# Altium PCB PowerBoard.PcbDoc
Units mm, origin at the board's own origin, x right, y up, seen from the top; angles counter-clockwise.
Board outline 59 x 39 mm, 2 copper layers (Top Layer, Bottom Layer), stack 1.571 mm thick; 18 components, 9 nets, 65 pads, 48 vias.
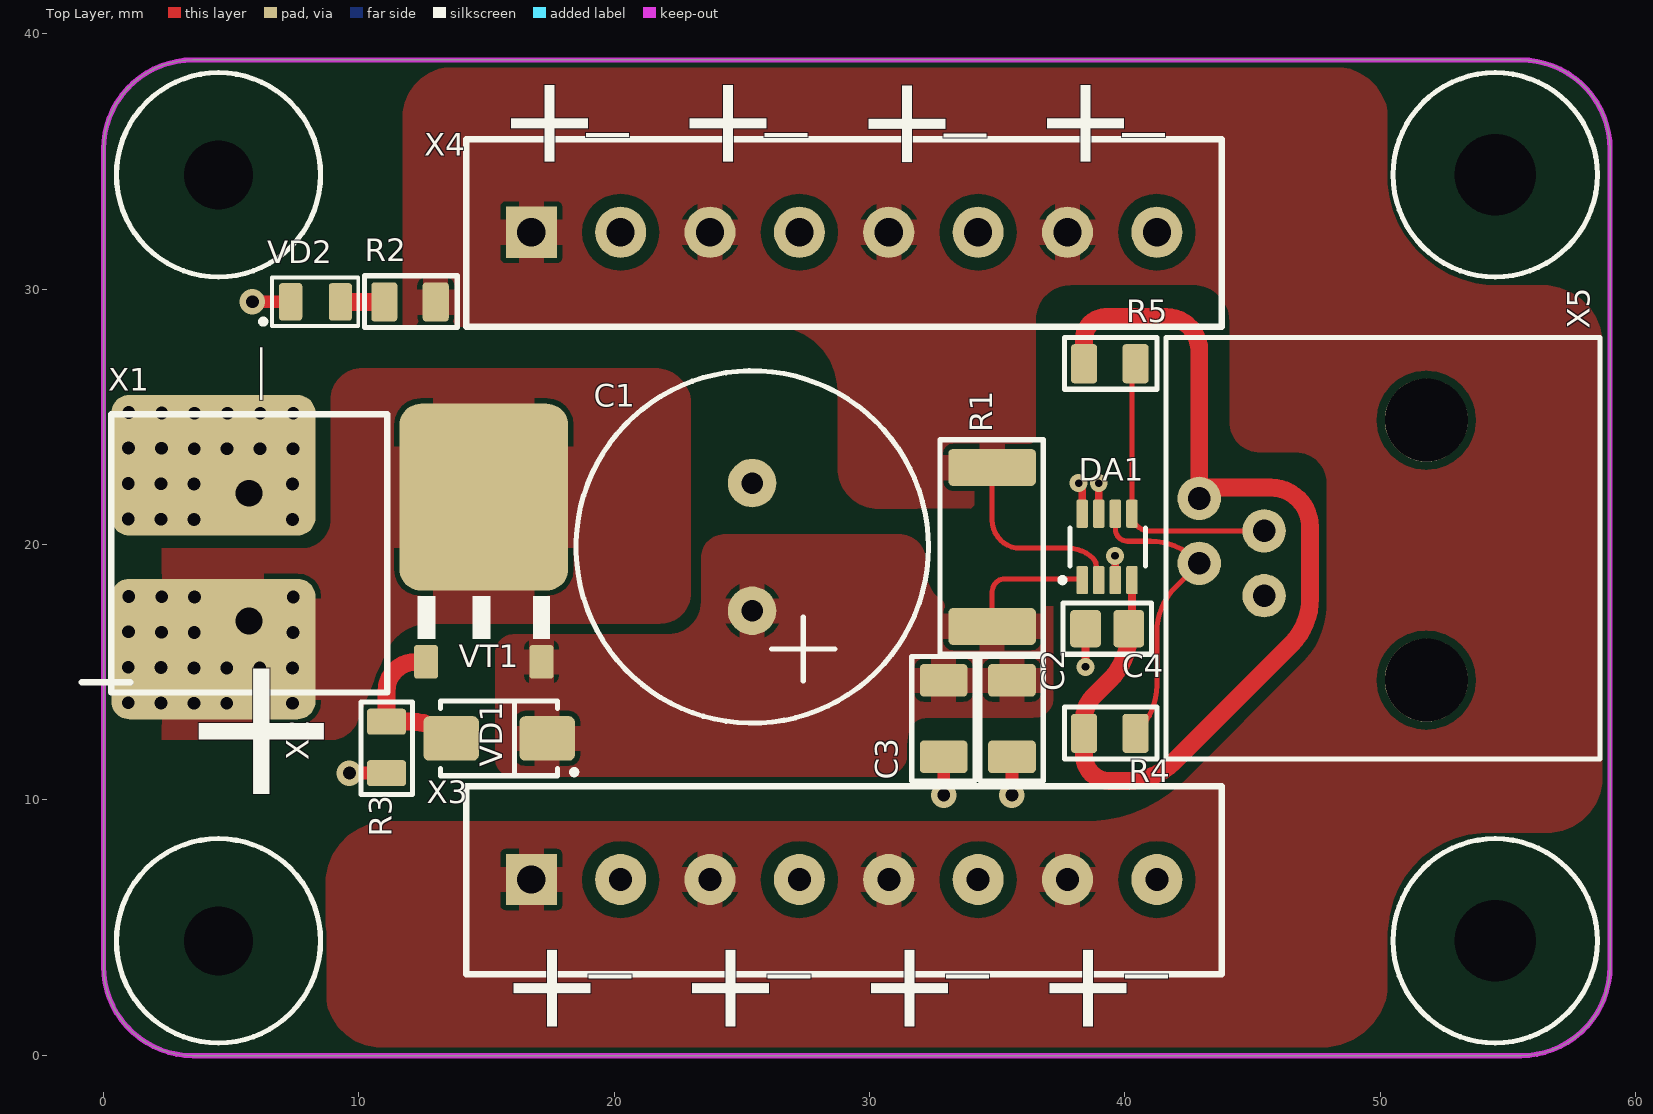
[diagram p0: Top Layer view]
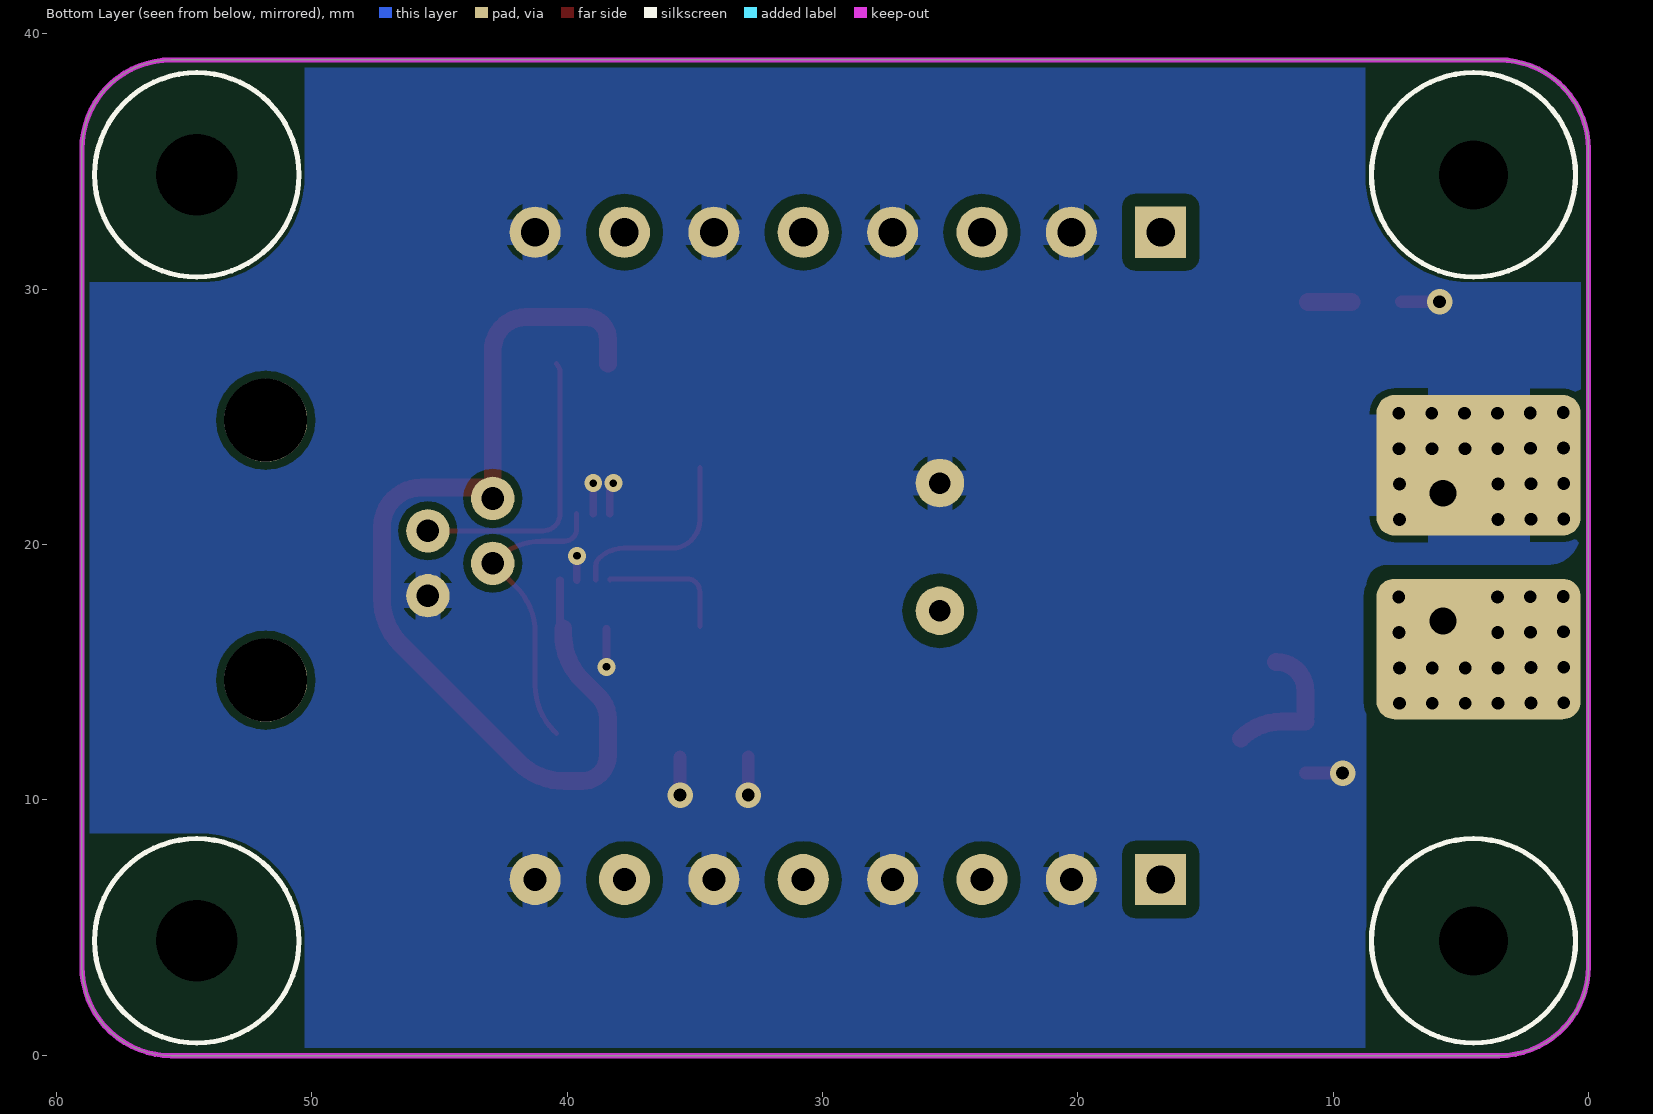
[diagram p1: Bottom Layer view, seen from below]

## Layer stack, top to bottom
Top Solder: solder mask 0.0102, Solder Resist, Dk 3.5
Top Layer: signal copper 0.0356
Dielectric 1: dielectric 1.5, FR-4, Dk 4.8
Bottom Layer: signal copper 0.0356
Bottom Solder: solder mask 0.0102, Solder Resist, Dk 3.5

## Board outline
3.5,-0.025 cw(c3.5,3.475) 0,3.475 0,35.475 cw(c3.5,35.475) 3.5,38.975 55.5,38.975 cw(c55.5,35.475) 59,35.475 59,3.475 cw(c55.5,3.475) 55.5,-0.025

## Design rules (kind name [scope] priority, off if disabled: settings)
Clearance Clearance_POWER_12B [InNet('12B') vs InNet('GND')] p1: gap=0.5 ignorepadtopadclearanceinfootprint=FALSE except(0: Arc-Hole Track-Hole SMDPad-Hole THPad-Hole Via-Hole Fill-Hole Poly-Hole Region-Hole Text-Hole; 0.2: Arc-SMDPad Arc-Via Track-SMDPad Track-Via SMDPad-SMDPad SMDPad-Via)
Clearance Clearance_POWER_12B_1 [InNet('NetVT1_2') vs InNet('GND')] p2: gap=0.5 ignorepadtopadclearanceinfootprint=FALSE except(0: Arc-Hole Track-Hole SMDPad-Hole THPad-Hole Via-Hole Fill-Hole Poly-Hole Region-Hole Text-Hole)
Clearance Clearance_POWER_12B_2 [InNet('NetC1_1') vs InNet('GND')] p3: gap=0.5 ignorepadtopadclearanceinfootprint=FALSE except(0: Arc-Hole Track-Hole SMDPad-Hole THPad-Hole Via-Hole Fill-Hole Poly-Hole Region-Hole Text-Hole)
Clearance Clearance_POWER_5B [InNet('5B') vs InNet('DGND')] p4: gap=0.3 ignorepadtopadclearanceinfootprint=FALSE except(0: Arc-Hole Track-Hole SMDPad-Hole THPad-Hole Via-Hole Fill-Hole Poly-Hole Region-Hole Text-Hole; 0.2: SMDPad-SMDPad; 0.4: Arc-THPad Track-THPad THPad-THPad THPad-Fill THPad-Poly THPad-Region)
Clearance [All] p5: gap=0.2 ignorepadtopadclearanceinfootprint=FALSE except(0: Arc-Hole Track-Hole SMDPad-Hole THPad-Hole Via-Hole Fill-Hole Poly-Hole Region-Hole Text-Hole; 0.3: Arc-THPad Track-THPad THPad-THPad THPad-Via THPad-Fill THPad-Poly THPad-Region THPad-Text)
HoleSize [All] p1: absolutevalues=TRUE maxlimit=5 minlimit=0.2 maxpercent=80.000 minpercent=20.000
HoleToHoleClearance [All] p1: gap=0 allowstackedmicrovias=TRUE
MinimumSolderMaskSliver [All] p1: minsoldermaskwidth=0.05
PolygonConnect NetTieDirect [InComponentClass('NetTieDirect')] p1: connectstyle=Direct reliefconductorwidth=0.254 reliefentries=4 polygonreliefangle="90 Angle" airgapwidth=0.254
PolygonConnect NetTieRelief [InComponentClass('NetTieRelief')] p2: connectstyle=Direct reliefconductorwidth=0.6 reliefentries=4 polygonreliefangle="90 Angle" airgapwidth=0.2
PolygonConnect PolygonConnect_GND_2 [HasFootprint('XT60-M') And OnLayer('Bottom Layer') vs InNet('GND')] p3: connectstyle=Relief reliefconductorwidth=4 reliefentries=4 polygonreliefangle="90 Angle" airgapwidth=0.254
PolygonConnect PolygonConnect_GND [InNet('GND')] p4: connectstyle=Relief reliefconductorwidth=1 reliefentries=4 polygonreliefangle="90 Angle" airgapwidth=0.2
PolygonConnect PolygonConnect_GND_12B [InNet('NetVT1_2')] p5: connectstyle=Relief reliefconductorwidth=4 reliefentries=4 polygonreliefangle="90 Angle" airgapwidth=0.2
PolygonConnect PolygonConnect_GND_12B_2 [InNet('NetC1_1')] p6: connectstyle=Relief reliefconductorwidth=1 reliefentries=4 polygonreliefangle="90 Angle" airgapwidth=0.2
PolygonConnect PolygonConnect_GND_12B_1 [InNet('12B')] p7: connectstyle=Relief reliefconductorwidth=1 reliefentries=4 polygonreliefangle="90 Angle" airgapwidth=0.2
PolygonConnect PolygonConnect_GND_1 [HasFootprint('TERMINAL 3 way-3.5mm') vs InNet('GND')] p8: connectstyle=Direct reliefconductorwidth=0.6 reliefentries=4 polygonreliefangle="90 Angle" airgapwidth=0.2
PolygonConnect PolygonConnect_via [IsVia] p9: connectstyle=Direct reliefconductorwidth=0.6 reliefentries=4 polygonreliefangle="90 Angle" airgapwidth=0.2
PolygonConnect [All] p10: connectstyle=Relief reliefconductorwidth=0.6 reliefentries=4 polygonreliefangle="90 Angle" airgapwidth=0.2
RoutingVias [All] p1: holewidth=0.711 width=1.27 viastyle="Through Hole" minholewidth=0.711 minwidth=1.27 maxholewidth=0.711 maxwidth=1.27
SilkToSilkClearance [All] p1: silktosilkclearance=0
SilkToSolderMaskClearance [IsPad] p1: minsilkscreentomaskgap=0 clearancetoexposedcopper=TRUE
SolderMaskExpansion [All] p1: expansion=0.05
Width [All] p1: maxlimit=3 minlimit=0.2 preferedwidth=0.3
25 further rules are at their usual default settings.

## Components (designator, comment, footprint, x,y, rotation, side; value= is the part's Value field where it differs from the comment)
C1 "Capacitor_pol" K50-35(10X20)_V 25.4,19.9 r180 top value=470мк
C2 "Capacitor" C1206 35.55,13.206 r90 top value=2,2мк
C3 "Capacitor" C1206 32.875,13.206 r90 top value=2,2мк
C4 "Capacitor" C0805 39.303,16.7 r0 top value=0,1мк
DA1 "INA219BIDCNT" SOT23-8 39.3,19.9 r90 top
R1 "Resistor_1Вт" R2512 34.8,19.9 r90 top value=0,01
R2 "Resistor_0,125Вт" R0805 12,29.498 r0 top value=1к
R3 "Resistor_0,125Вт" R0805 11.079,12.05 r270 top value=10к
R4 "Resistor_0,125Вт" R0805 39.407,12.6 r0 top value=10к
R5 "Resistor_0,125Вт" R0805 39.407,27.075 r0 top value=10к
VD1 "DiodeZener" SMA 15.489,12.4 r180 top
VD2 "LED" L_0805 8.3,29.5 r0 top
VT1 "P-MOSFET" DPAK 14.889,21.699 r0 top
X1 "Header_2_trm" TERMINAL-2WAY-5MM 5.7,19.5 r90 top
X2 "Header_2_sct" XT60-M 0.3,19.5 r90 top
X3 "Header_8_trm" TERMINAL-8WAY-3.5MM 29,6.875 r0 top
X4 "Header_8_trm" TERMINAL-8WAY-3.5MM_ 29,32.225 r0 top
X5 "Header_4_sct" 69254-002LF 50.1,19.9 r270 top

## Footprints (in the part's own frame and the unit in brackets; to place one, negate y for a bottom-side part, rotate by r counter-clockwise, add the part's x,y. Pads: shape width x height; smd on the part's side, far side on the other; paste and mask are expansions set on the pad)
69254-002LF [mm]
  round 1.7 hole 0.89: 1(-0.63,-4.65) 2(-1.9,-7.19) 3(1.91,-4.65) 4(0.64,-7.19)
  round 3.25 hole 3.25 unplated: ""(-4.965,1.7) ""(5.215,1.7)
  silkscreen extent -8.2,-8.5 8.3,8.5, body extent -7.85,-8.19 7.9,8.19, height 15.05
C0805 [mm]
  rrect25% 1.21x1.46 smd paste-5: 1(-0.845,0) 2(0.845,0)
  silkscreen extent -1.73,-1 1.73,1, body extent -1,-0.62 1,0.63, height 0.78
C1206 [mm]
  rrect25% 1.28x1.87 smd: 1(-1.528,-0.024) 2(1.472,-0.024)
  silkscreen extent -2.47,-1.25 2.4,1.23, body extent -1.6,-0.85 1.6,0.85, height 1.75
DPAK [mil]
  rrect25% 37x52 smd: 1(-89,-248) 3(89,-248)
  rrect25% 260x288 smd: 2(0,6)
  silkscreen extent -102,-213 102,-146, body extent -193,-266 128,108, height 91
K50-35(10X20)_V [mm]
  round 1.9 hole 0.85 mask+0.102: 1(0,2.5)
  round 1.9 hole 0.85: 2(0,-2.5)
  silkscreen extent -6.9,-6.9 6.9,6.9, body extent -6.25,-6.25 6.25,6.25, height 25.1
L_0805 [mm] "SMD LED LAMP"
  rrect25% 0.91x1.46 smd: 1(-0.975,0) 2(0.975,0)
  silkscreen extent -2.15,-0.95 1.68,0.95, body extent -1.01,-0.62 1.01,0.63, height 1.1
R0805 [mm] "Chip Resistor, 2-Leads, Body 2,10x1,30mm, IPC Medium Density"
  rrect25% 1.02x1.53 smd paste-5: 1(-1.007,0) 2(1.007,0)
  silkscreen extent -1.78,-1 1.85,1.02, body extent -1.1,-0.7 1.1,0.7, height 0.55
R2512 [mm]
  rrect25% 1.45x3.43 smd: 1(-3.115,0) 2(3.115,0)
  silkscreen extent -4.2,-2 4.2,2.05, body extent -3.35,-1.6 3.35,1.6, height 0.55
SMA [mm]
  rrect25% 2.17x1.74 smd: 1(-1.88,0) 2(1.88,0)
  silkscreen extent -3.04,-1.46 2.29,1.46, body extent -2.5,-1.35 2.5,1.35, height 2.15
SOT23-8 [mm]
  rrect25% 1.1x0.45 smd: 1(-1.3,0.975) 2(-1.3,0.325) 3(-1.3,-0.325) 4(-1.3,-0.975) 5(1.3,-0.975) 6(1.3,-0.325) 7(1.3,0.325) 8(1.3,0.975)
  silkscreen extent -1.4,-1.5 0.75,1.85, body extent -1.43,-1.5 1.37,1.44, height 1.2
TERMINAL-2WAY-5MM [mm]
  rect 1.7x1.7 hole 1.05: 1(-2.5,0)
  round 1.7 hole 1.05: 2(2.5,0)
  silkscreen extent -5.3,-5.4 5.6,5.4, body extent -5,-5.07 5.3,5.13, height 14.3
TERMINAL-8WAY-3.5MM [mm]
  rect 2x2 hole 1.1: 1(-12.25,0)
  round 2 hole 0.9: 2(-8.75,0) 3(-5.25,0) 4(-1.75,0) 5(1.75,0) 6(5.25,0) 7(8.75,0) 8(12.25,0)
  silkscreen extent -14.8,-3.7 14.8,3.65, body extent -14.5,-3.37 14.5,3.43, height 8.4
TERMINAL-8WAY-3.5MM_ [mm]
  rect 2x2 hole 1.1: 1(-12.25,0)
  round 2 hole 1.1: 2(-8.75,0) 3(-5.25,0) 4(-1.75,0) 5(1.75,0) 6(5.25,0) 7(8.75,0) 8(12.25,0)
  silkscreen extent -14.8,-3.7 14.8,3.65, body extent -14.5,-3.43 14.5,3.37, height 8.4
XT60-M [mm]
  rrect25% 5.5x8 smd: 1(-3.6,-4) 2(3.6,-4)
  rrect25% 5.5x8 smd far side: 1(-3.6,-4) 2(3.6,-4)
  body extent -7.9,-4.5 8,16.7, height 6.18

## Part data
C1: library part cap203, "Конденсатор полярный", Manufacture=Jamicon, Part Name=Electrolit, Part Number=TKR471M1HG20, Voltage=50В, id=cap203, tga=0,10%
C2 C3: library part cap188, "Конденсатор", Part Name=Capacitors, Part Number=GRM31CR71H225KA88**L, Voltage=50В, id=cap188, TKE=X7R
C4: library part cap161, "Конденсатор", Part Name=Capacitors, Part Number=GRM21BR71H104KA01L, Voltage=50В, id=cap161, TKE=X7R
DA1: library part interf16, "Токочувствительный усилитель", Manufacture="Texas Instruments", Offset voltage=40uB, Part Name="Current/Power Monitor With I 2C Interface", Power Supply=3.0-5.5V, Address="A0 A1 adress pin", Bandwidth=11kHz, CMRR=120dB, id=interf16, Input channel=diff, Number of Channel=1, Part Number=INA219BIDCNT, Resolution=12bit, Type Supply="Single Polar"
R1: library part res777, "Резистор", Manufacture=Yageo, Part Name=Resistor, Part Number=RL2512FK-070R01L, Power=1Вт, Accuracy=0,01, id=res777
R2: library part res76, "Резистор", Manufacture=Yageo, Part Name=Resistor, Part Number=RC0805FR-071KL, Power=0,125Вт, Accuracy=0,01, id=res76
R3 R4 R5: library part res97, "Резистор", Part Name=Resistor, Power=0,125Вт, Accuracy=1%, id=res97
VD1: library part SMAJ12A, "Cтабилитрон (лавинный выпрямительный диод) односторонний", Breakdown Voltage=14B, Clamping voltage=19,9B, Dynamic resistance=0,259Ohm, Leakage Current=0,2uA, Manufacture="ST Microelectronics", Part Name="TVS diode Unidirectional", Peak Pulse Power=400W, Stand-off Voltage=12B, id=tvs128, Number of diodes=1, Part Number=SMAJ12A
VD2: library part diode5, "Светодиод", Part Number=KP-2012EC, id=diode5, Part Name=LED
VT1: library part mosfert8, "N-MOSFET", Continuous drain current=(-55)A, Gate-to-source voltage=(+-)25B, Manufacturer="Fairchild Semiconductor", Part Number=FDD6637, Power dissipation=57W, Pulsed drain current=(-100)A, id=mosfert8, Rds=0,0116Ohm, Structure=p-channel, V drain-source max=(-35B)
X1: library part connect21, "Разъем - 2 конт. клеммник", Part Name="TERMINAL BLOCK 2 way", Contact_1=12B, Contact_2=GND, Etch=5mm, id=connect21
X2: library part connect70, "Разъем - 2 конт. розетка", Manufacture="Amass Electronics", Part Name=XT60-M, Part Number=XT60-F.G2.Y, Contact_1=12B, Contact_2=GND, Etch=7.2mm, id=connect70
X3: library part connect67, "Разъем - 8 конт. вилка", Part Name="TERMINAL BLOCK 8 way", Contact_1=12B, Contact_2=GND, Contact_3=12B, Contact_4=GND, Contact_5=12B, Contact_6=GND, Contact_7=12B, Contact_8=GND, Etch=3.5mm, id=connect67
X4: library part connect68, "Разъем - 8 конт. вилка", Part Name="TERMINAL BLOCK 8 way", Contact_1=12B, Contact_2=GND, Contact_3=12B, Contact_4=GND, Contact_5=12B, Contact_6=GND, Contact_7=12B, Contact_8=GND, Contact_48=#ИМЯ?, Etch=3.5mm, id=connect68
X5: library part connect63, "Разъем - 4 конт. розетка", Manufacture="Amphenol ICC (FCI)", Part Name="Jack 6p4c (RJ11, RJ14) Vertical", Part Number=69254-002LF, Contact_1=SCL, Contact_2=VCC, Contact_3=GND, Contact_4=SDA, id=connect63

## Free pads (board coordinates)
  round 0 hole 2.7 unplated: ""(4.5,4.475) ""(4.5,34.475)
  round 0 hole 3.2 unplated: ""(54.5,4.475) ""(54.5,34.475)

## Via types
v1: diameter 1, hole 0.5, Top Layer to Bottom Layer, 40 vias
v2: diameter 1, hole 0.5, Top Layer to Bottom Layer, tented both sides, 4 vias
v3: diameter 0.7, hole 0.3, Top Layer to Bottom Layer, tented both sides, 4 vias

## Nets (pads, with @x,y where several pads share a name; then routed paths per layer and width w, separated by ;. In a path a pad name is that pad's centre, name@x,y a point inside that pad or via, vN(x,y) a via of type N, cw(c..) or ccw(c..) an arc to the next point about the centre after c; other vN are vias at no path point)
5B: C4.2 DA1.4 R4.1 R5.1 X5.2 | length 41
  Top Layer w0.3: C4.2 ccw(c40.148,16.827) 40.275,16.827 DA1.4
  Top Layer w0.7: R5.1 38.4,28.05 cw(c39.25,28.05) 39.25,28.9 41.61,28.9 cw(c41.61,27.6) 42.91,27.6 X5.2 43.335,22.225 45.705,22.225 cw(c45.705,20.68) 47.25,20.68 47.25,17.878 cw(c44.71,17.878) 46.506,16.082 41.899,11.475 cw(c40.103,13.271) 40.103,10.731 39.407,10.731 cw(c39.407,11.738) 38.4,11.738 R4.1 38.4,13.174 cw(c39.625,13.174) 38.759,14.04 39.404,14.685 ccw(c37.608,16.481) 40.148,16.481 C4.2
12B: DA1.2 R1.2 R2.2 X3.1 X3.3 X3.5 X3.7 X4.1 X4.3 X4.5 X4.7 | length 7.6
  Top Layer w0.2: R1.2 34.8,20.952 ccw(c35.9,20.952) 35.9,19.852 37.78,19.852 cw(c37.78,18.48) 38.75,19.45 cw(c38.448,19.148) 38.875,19.148 DA1.2@38.875,18.6
GND: C1.2 C2.1 C3.1 C4.1 DA1.3 DA1.7 DA1.8 R3.2 VD2.1 X1.2 X2.2 X3.2 X3.4 X3.6 X3.8 X4.2 X4.4 X4.6 X4.8 X5.3 | length 10.8
  Top Layer w0.3: v3(38.187,22.4) 38.325,22.262 DA1.8 ; v3(38.458,15.205) C4.1 ; DA1.7 v3(38.975,22.4) ; DA1.3 v3@39.625,19.55
  Top Layer w0.5: v2(5.831,29.5) VD2.1 ; v2(9.629,11.043) R3.2 ; v2(32.899,10.183) C3.1 ; v2(35.574,10.183) C2.1
  other v1: 2.25,20.987 3.537,20.975 7.4,20.975 0.962,21 2.25,22.375 3.537,22.362 7.4,22.362 0.962,22.387 3.55,23.75 4.837,23.75 6.125,23.75 7.412,23.75 0.975,23.775 2.262,23.762 2.275,25.15 3.562,25.137 4.85,25.137 6.137,25.137 7.425,25.137 0.987,25.162
  other v3: 39.608,19.55
NetC1_1: C1.1 C2.2 C3.2 DA1.1 R1.1 VD1.1 VT1.3 | length 5.2
  Top Layer w0.2: R1.1 34.8,18.15 cw(c35.3,18.15) 35.3,18.65 38.275,18.65 cw(c38.275,18.6) DA1.1
NetDA1_5: DA1.5 R5.2 X5.1 | length 11.5
  Top Layer w0.2: R5.2 ccw(c40.753,26.737) 40.275,26.737 DA1.5 ccw(c40.945,21.2) 40.945,20.53 X5.1
NetDA1_6: DA1.6 R4.2 X5.4 | length 11.9
  Top Layer w0.2: DA1.6 39.625,20.6 ccw(c40.1,20.6) 40.1,20.125 40.993,20.125 cw(c40.993,17.585) 42.789,19.381 X5.4 41.994,18.344 ccw(c43.79,16.548) 41.25,16.548 41.25,14.487 cw(c38.71,14.487) 40.506,12.691 R4.2
NetR2_1: R2.1 VD2.2 | length 1.7
  Top Layer w0.7: VD2.2 R2.1 R2.1
NetR3_1: R3.1 VD1.2 VT1.1 | length 5.5
  Top Layer w0.7: R3.1 12.022,13.057 cw(c12.022,10.813) VD1.2 ; R3.1@11.079,13.257 11.079,14.25 cw(c12.229,14.25) VT1.1@12.229,15.4
NetVT1_2: VT1.2 X1.1 X2.1
  other v1: 3.537,13.775 4.825,13.775 6.112,13.775 7.4,13.775 0.962,13.8 2.25,13.787 3.537,15.162 4.825,15.162 6.112,15.162 7.4,15.162 0.962,15.187 2.25,15.175 2.262,16.562 3.55,16.55 7.412,16.55 0.975,16.575 3.562,17.937 7.425,17.937 0.987,17.962 2.275,17.95
pads on no net: X5.

## Polygon pours and split planes (outlines as drawn)
NetVT1_2 on Top Layer "Top Signal Layer-No Net" (solid, remove dead copper, pour order 0): 2.275,19.848 7.767,19.848 ccw(c7.767,20.977) 8.897,20.977 8.897,25.662 cw(c10.134,25.662) 10.134,26.9 21.6,26.9 cw(c21.6,25.5) 23,25.5 23,18.1 cw(c21.8,18.1) 21.8,16.9 16,16.9 13.425,16.9 12.784,16.9 ccw(c12.784,15.003) 11.027,15.72 9.935,13.047 cw(c8.897,13.472) 8.897,12.35 2.275,12.35
NetC1_1 on Top Layer "Top Signal Layer-No Net" (solid, remove dead copper, pour order 2): 15.33,11.61 15.33,15.73 cw(c16.09,15.73) 16.09,16.49 19.09,16.49 22.14,16.49 ccw(c22.14,17.75) 23.4,17.75 23.4,19.463 cw(c24.337,19.463) 24.337,20.4 31.15,20.4 cw(c31.15,19.351) 32.2,19.35 32.2,18.988 ccw(c33.613,18.988) 33.613,17.575 37.2,17.575 37.2,15.668 37.2,14 cw(c36.403,14) 36.403,13.203 32.228,13.203 ccw(c32.228,12.475) 31.5,12.475 31.5,11.875 cw(c30.525,11.875) 30.525,10.9 16.04,10.9 cw(c16.04,11.61)
12B on Top Layer "Top Signal Layer-No Net" (solid, remove dead copper, pour order 8): 31.875,21.4 35.55,21.4 ccw(c35.55,22.35) 36.5,22.35 36.5,28.8 cw(c37.849,28.8) 37.85,30.15 42.685,30.15 cw(c42.685,28.735) 44.1,28.735 44.1,24.8 ccw(c45.3,24.8) 45.3,23.6 46.715,23.6 cw(c46.715,22.415) 47.9,22.415 47.9,17.642 cw(c44.699,17.641) 46.962,15.377 42.352,10.768 cw(c38.447,14.672) 38.447,9.15 11.14,9.15 ccw(c11.14,6.71) 8.7,6.71 8.7,2.5 ccw(c10.9,2.5) 10.9,0.3 47.7,0.3 ccw(c47.7,2.906) 50.306,2.906 50.306,4.825 cw(c54.181,4.825) 54.181,8.7 56.5,8.7 ccw(c56.5,10.9) 58.7,10.9 58.7,27.8 ccw(c56.35,27.8) 56.35,30.15 54.55,30.15 cw(c54.55,34.394) 50.306,34.394 50.306,36.594 ccw(c48.2,36.595) 48.2,38.7 13.7,38.7 ccw(c13.7,36.725) 11.725,36.725 11.725,28.525 26.245,28.525 cw(c26.245,26.02) 28.75,26.02 28.75,23 ccw(c30.354,23) 30.355,21.395 31.981,21.395 cw(c31.981,21.35) 32.026,21.35
GND on Bottom Layer "Top Signal Layer-No Net" (solid, remove dead copper, pour order 6): 9.3,-0.025 59,-0.025 59,38.975 0.3,38.975 0.3,20.5 ccw(c1.6,20.5) 1.6,19.2 7.9,19.2 cw(c7.9,18.4) 8.7,18.4 8.7,12.6 8.7,-0.025

## Keep-outs
Keep-Out Layer:
  the board outline again, w0.2

## Other copper
Top Layer:
  pour cut-out: 0,30.263 0,35.198 0,38.9 0.473,38.9 8.73,38.9 8.73,34.405 cw(c4.588,34.405) 4.588,30.263
  pour cut-out: 0,8.687 0,3.752 0,0.05 0.473,0.05 8.73,0.05 8.73,4.545 ccw(c4.588,4.545) 4.588,8.687
  pour cut-out: 59,8.687 59,3.752 59,0.05 58.527,0.05 50.27,0.05 50.27,4.545 cw(c54.412,4.545) 54.412,8.687
  pour cut-out: 59,30.263 59,35.198 59,38.9 58.527,38.9 50.27,38.9 50.27,34.405 ccw(c54.412,34.405) 54.412,30.263
  pour cut-out: 34.2,17.5 34.2,18.4 35.5,18.4 35.5,17.478 ccw(c35.478,17.478) 35.478,17.5
  pour cut-out: 35.4,22.3 35.4,21.4 34.1,21.4 34.1,22.322 ccw(c34.122,22.322) 34.122,22.3
Bottom Layer:
  pour cut-out: 0,30.263 0,35.198 0,38.9 0.473,38.9 8.73,38.9 8.73,34.405 cw(c4.588,34.405) 4.588,30.263
  pour cut-out: 0,8.687 0,3.752 0,0.05 0.473,0.05 8.73,0.05 8.73,4.545 ccw(c4.588,4.545) 4.588,8.687
  pour cut-out: 59,8.687 59,3.752 59,0.05 58.527,0.05 50.27,0.05 50.27,4.545 cw(c54.412,4.545) 54.412,8.687
  pour cut-out: 59,30.263 59,35.198 59,38.9 58.527,38.9 50.27,38.9 50.27,34.405 ccw(c54.412,34.405) 54.412,30.263

## Silkscreen, mask and mechanical layers (free items; w line width, h text height)
Top Overlay:
  circle w0.2: c4.5,4.475 r4
  circle w0.2: c4.5,34.475 r4
  circle w0.2: c54.5,4.475 r4
  circle w0.2: c54.5,34.475 r4
  lines w0.254: -0.85,14.6 1.05,14.6
  text "-" at 20.9,39.1 h8 r180
  text "-" at 27.9,39.1 h8 r180
  text "-" at 41.9,39.1 h8 r180
  text "-" at 34.9,39.075 h8 r180
  text "+" at 14.806,38.5 h6 r270
  text "+" at 21.806,38.5 h6 r270
  text "+" at 35.806,38.5 h6 r270
  text "+" at 28.805,38.475 h6 r270
  text "-" at 2.4,28.1 h10 r270
  text "+" at 2.9,8.3 h10
  text "+" at 14.906,0.6 h6 r270
  text "+" at 21.906,0.6 h6 r270
  text "+" at 28.906,0.6 h6 r270
  text "+" at 35.906,0.6 h6 r270
  text "-" at 21,0 h8
  text "-" at 28,0 h8
  text "-" at 35,0 h8
  text "-" at 42,0 h8
Bottom Overlay:
  circle w0.2: c4.5,4.475 r4
  circle w0.2: c4.5,34.475 r4
  circle w0.2: c54.5,4.475 r4
  circle w0.2: c54.5,34.475 r4